# Altium PCB Main_Board - 06162023 - RevA.PcbDoc (part 1 of 2)
Units mil, origin at the board's own origin, x right, y up, seen from the top; angles counter-clockwise.
Board outline 8721.46 x 3937.01 mil, 4 copper layers (Top Layer, Layer 2, Layer 3, Bottom Layer), stack 22.378 mil thick; 18 components, 31 nets, 221 pads, 55 vias.
Unrouted connection lines stored in the file: 4.
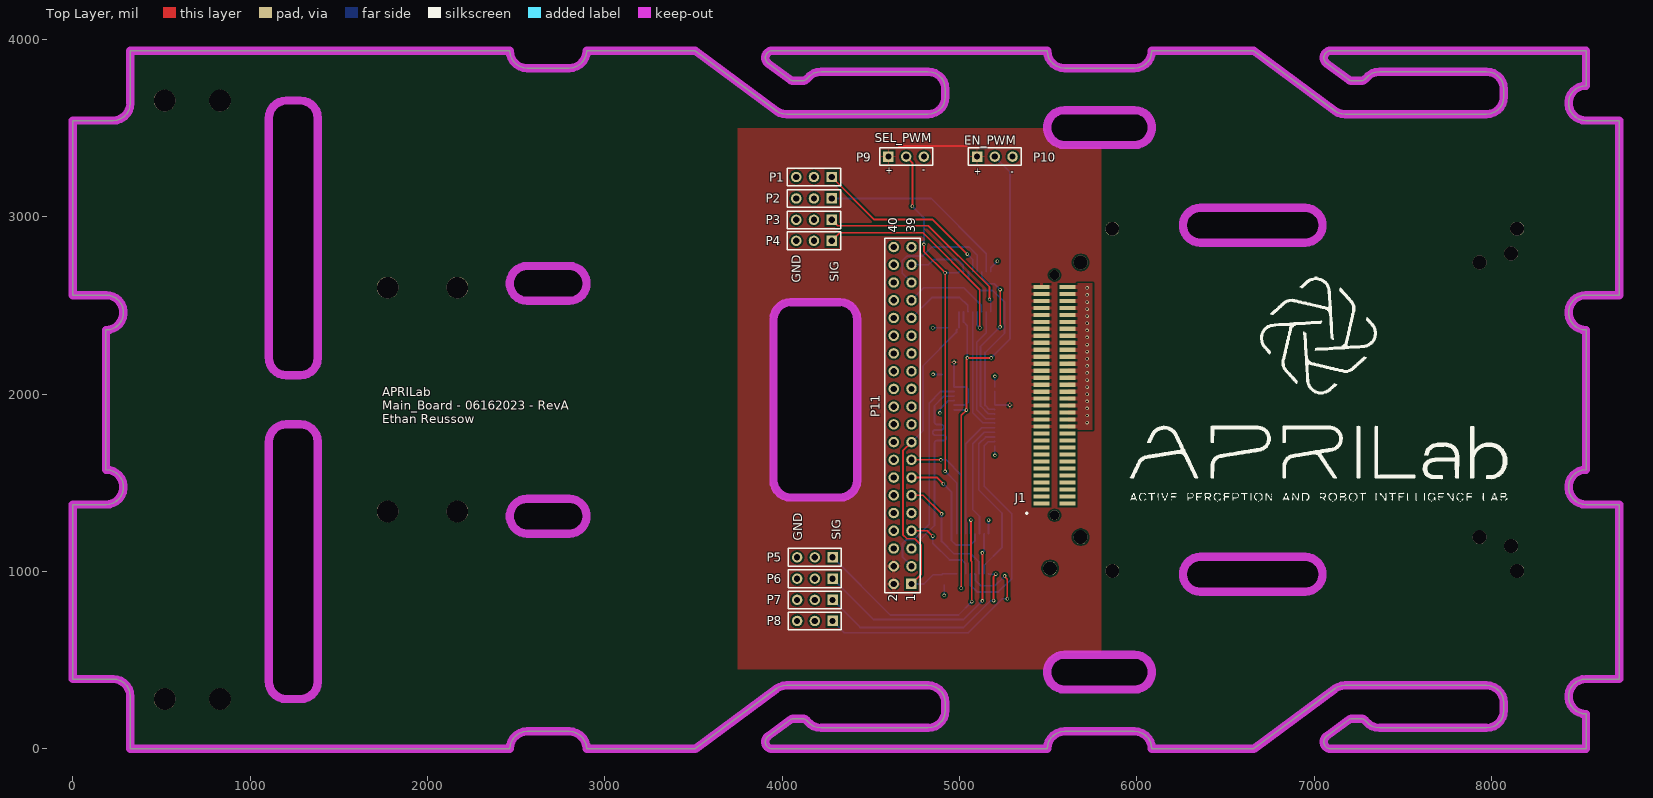
[diagram p0: Top Layer view]
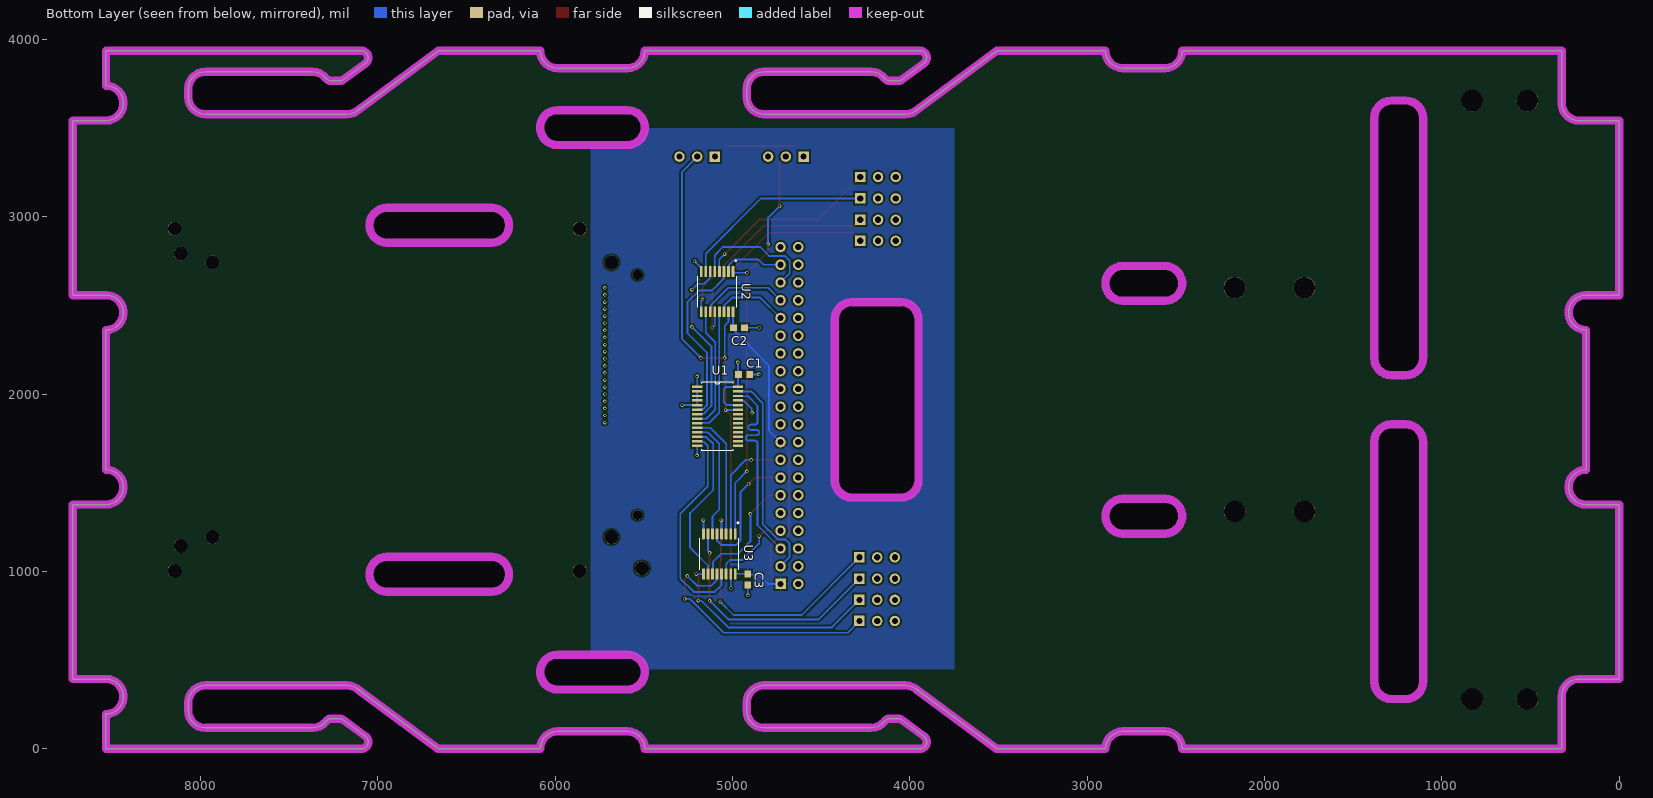
[diagram p1: Bottom Layer view, seen from below]
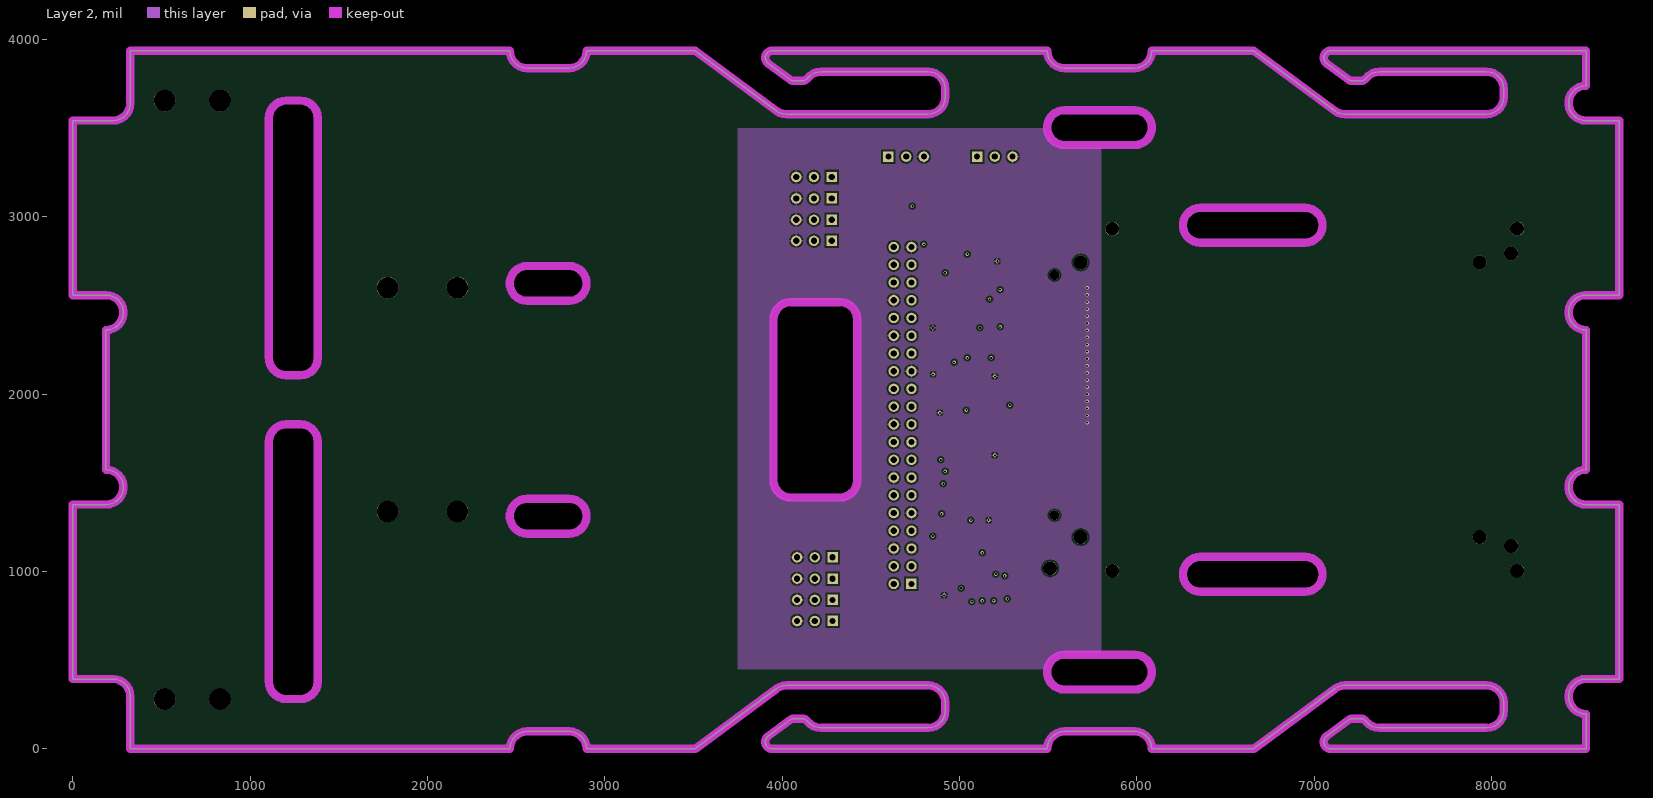
[diagram p2: Layer 2]
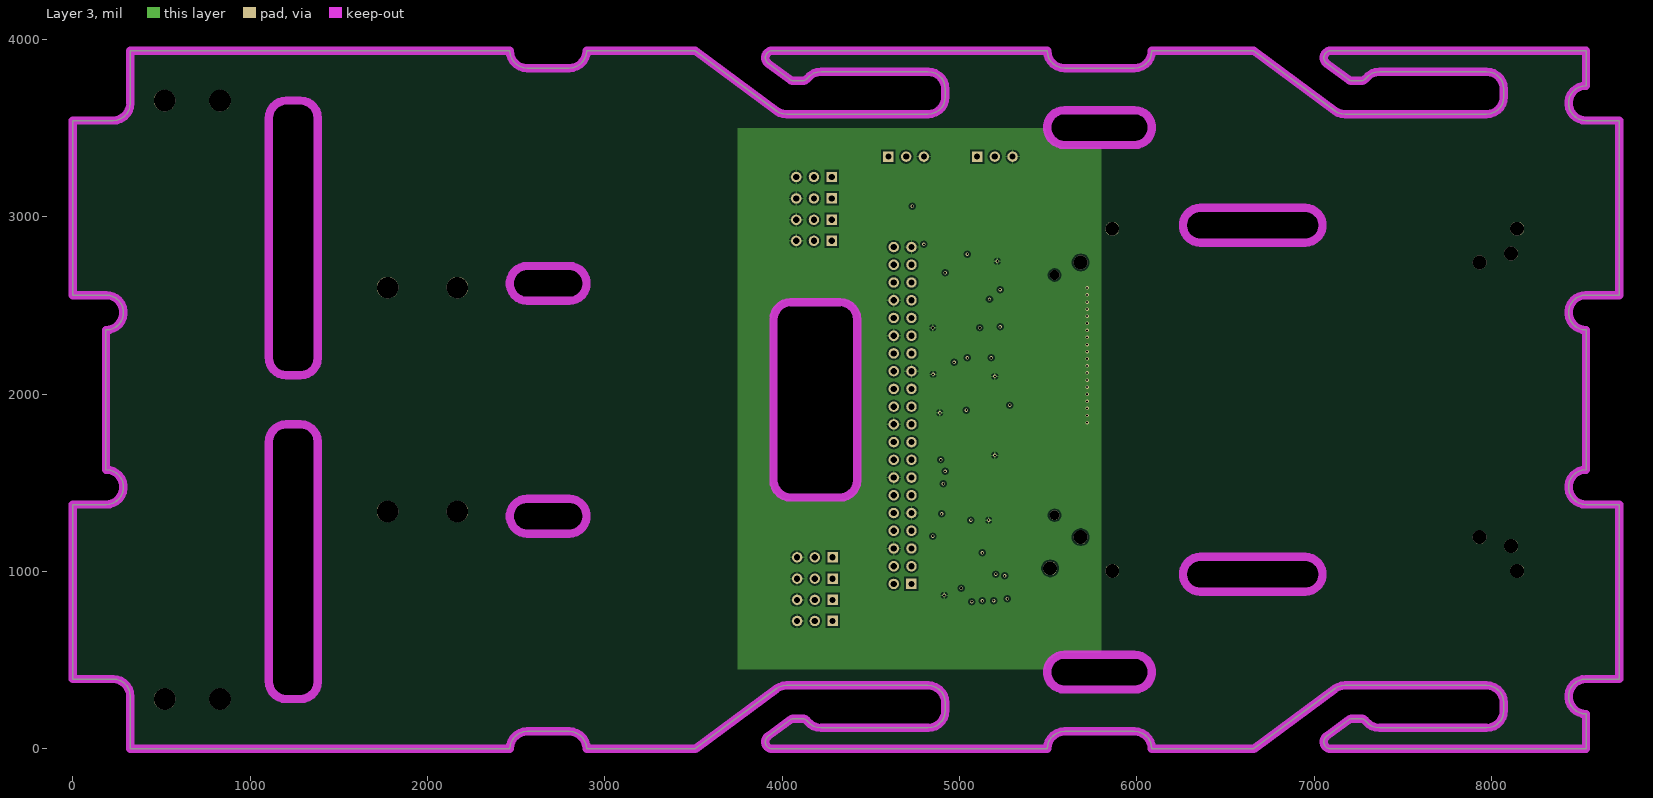
[diagram p3: Layer 3]

## Layer stack, top to bottom
Top Solder: solder mask 0.4, Solder Resist, Dk 3.5
Top Layer: signal copper 1.4
Dielectric 2: prepreg 2.8, PP-006, Dk 4.1
Layer 2: signal copper 0.689
Dielectric 1: dielectric 12.6, FR-4, Dk 4.8
Layer 3: signal copper 0.689
Dielectric 3: prepreg 2.8, PP-006, Dk 4.1
Bottom Layer: signal copper 1.4
Bottom Solder: solder mask 0.4, Solder Resist, Dk 3.5

## Board outline
377 vertices, not listed, extent 0,0 8721.46,3937.01
cut-out: 2563.09,2526.25 2542.63,2528.4 2523.06,2534.76 2505.24,2545.04 2489.95,2558.81 2477.85,2575.46 2469.48,2594.26 2465.2,2614.38 2465.2,2634.96 2469.48,2655.09 2477.85,2673.88 2489.95,2690.53 2505.24,2704.3 2523.06,2714.59 2542.63,2720.95 2563.09,2723.1 2799.31,2723.1 2819.77,2720.95 2839.34,2714.59 2857.16,2704.3 2872.45,2690.53 2884.55,2673.88 2892.92,2655.09 2897.2,2634.96 2897.2,2614.38 2892.92,2594.26 2884.55,2575.46 2872.45,2558.81 2857.16,2545.04 2839.34,2534.76 2819.77,2528.4 2799.31,2526.25
cut-out: 2563.09,1213.91 2542.63,1216.06 2523.06,1222.42 2505.24,1232.71 2489.95,1246.48 2477.85,1263.12 2469.48,1281.92 2465.2,1302.05 2465.2,1322.62 2469.48,1342.75 2477.85,1361.55 2489.95,1378.19 2505.24,1391.96 2523.06,1402.25 2542.63,1408.61 2563.09,1410.76 2799.31,1410.76 2819.77,1408.61 2839.34,1402.25 2857.16,1391.96 2872.45,1378.19 2884.55,1361.55 2892.92,1342.75 2897.2,1322.62 2897.2,1302.05 2892.92,1281.92 2884.55,1263.12 2872.45,1246.48 2857.16,1232.71 2839.34,1222.42 2819.77,1216.06 2799.31,1213.91
cut-out: 1283.56,2106.3 1204.82,2106.3 1182.92,2108.77 1162.12,2116.05 1143.46,2127.77 1127.87,2143.36 1116.14,2162.02 1108.86,2182.82 1106.4,2204.72 1106.4,3557.68 1108.86,3579.58 1116.14,3600.38 1127.87,3619.04 1143.46,3634.63 1162.12,3646.35 1182.92,3653.63 1204.82,3656.1 1283.56,3656.1 1305.46,3653.63 1326.27,3646.35 1344.93,3634.63 1360.51,3619.04 1372.24,3600.38 1379.52,3579.58 1381.99,3557.68 1381.99,2204.72 1379.52,2182.82 1372.24,2162.02 1360.51,2143.36 1344.93,2127.77 1326.27,2116.05 1305.46,2108.77
cut-out: 1283.56,280.91 1204.82,280.91 1182.92,283.37 1162.12,290.65 1143.46,302.38 1127.87,317.96 1116.14,336.63 1108.86,357.43 1106.4,379.33 1106.4,1732.28 1108.86,1754.18 1116.14,1774.99 1127.87,1793.65 1143.46,1809.24 1162.12,1820.96 1182.92,1828.24 1204.82,1830.71 1283.56,1830.71 1305.46,1828.24 1326.27,1820.96 1344.93,1809.24 1360.51,1793.65 1372.24,1774.99 1379.52,1754.18 1381.99,1732.28 1381.99,379.33 1379.52,357.43 1372.24,336.63 1360.51,317.96 1344.93,302.38 1326.27,290.65 1305.46,283.37
cut-out: 6949.8,885.83 6359.25,885.83 6338.79,887.98 6319.22,894.34 6301.4,904.62 6286.11,918.39 6274.01,935.04 6265.64,953.84 6261.37,973.96 6261.37,994.54 6265.64,1014.67 6274.01,1033.46 6286.11,1050.11 6301.4,1063.88 6319.22,1074.17 6338.79,1080.53 6359.25,1082.68 6949.8,1082.68 6970.27,1080.53 6989.84,1074.17 7007.66,1063.88 7022.95,1050.11 7035.04,1033.46 7043.41,1014.67 7047.69,994.54 7047.69,973.96 7043.41,953.84 7035.04,935.04 7022.95,918.39 7007.66,904.62 6989.84,894.34 6970.27,887.98
cut-out: 6359.25,3051.18 6949.8,3051.18 6970.27,3049.03 6989.84,3042.67 7007.66,3032.38 7022.95,3018.61 7035.04,3001.97 7043.41,2983.17 7047.69,2963.04 7047.69,2942.47 7043.41,2922.34 7035.04,2903.54 7022.95,2886.9 7007.66,2873.13 6989.84,2862.84 6970.27,2856.48 6949.8,2854.33 6359.25,2854.33 6338.79,2856.48 6319.22,2862.84 6301.4,2873.13 6286.11,2886.9 6274.01,2903.54 6265.64,2922.34 6261.37,2942.47 6261.37,2963.04 6265.64,2983.17 6274.01,3001.97 6286.11,3018.61 6301.4,3032.38 6319.22,3042.67 6338.79,3049.03
cut-out: 5987.36,334.65 5593.66,334.65 5573.19,336.8 5553.62,343.15 5535.8,353.44 5520.51,367.21 5508.42,383.86 5500.05,402.66 5495.77,422.78 5495.77,443.36 5500.05,463.49 5508.42,482.28 5520.51,498.93 5535.8,512.7 5553.62,522.99 5573.19,529.35 5593.66,531.5 5987.36,531.5 6007.82,529.35 6027.39,522.99 6045.21,512.7 6060.5,498.93 6072.6,482.28 6080.96,463.49 6085.24,443.36 6085.24,422.78 6080.96,402.66 6072.6,383.86 6060.5,367.21 6045.21,353.44 6027.39,343.15 6007.82,336.8
cut-out: 5593.66,3602.36 5987.36,3602.36 6007.82,3600.21 6027.39,3593.85 6045.21,3583.56 6060.5,3569.8 6072.6,3553.15 6080.96,3534.35 6085.24,3514.22 6085.24,3493.65 6080.96,3473.52 6072.6,3454.72 6060.5,3438.08 6045.21,3424.31 6027.39,3414.02 6007.82,3407.66 5987.36,3405.51 5593.66,3405.51 5573.19,3407.66 5553.62,3414.02 5535.8,3424.31 5520.51,3438.08 5508.42,3454.72 5500.05,3473.52 5495.77,3493.65 5495.77,3514.22 5500.05,3534.35 5508.42,3553.15 5520.51,3569.8 5535.8,3583.56 5553.62,3593.85 5573.19,3600.21
cut-out: 4050.26,2519.68 4325.85,2519.68 4347.76,2517.22 4368.56,2509.94 4387.22,2498.21 4402.81,2482.63 4414.53,2463.96 4421.81,2443.16 4424.28,2421.26 4424.28,1515.75 4421.81,1493.85 4414.53,1473.04 4402.81,1454.38 4387.22,1438.8 4368.56,1427.07 4347.76,1419.79 4325.85,1417.32 4050.26,1417.32 4028.36,1419.79 4007.56,1427.07 3988.9,1438.8 3973.31,1454.38 3961.59,1473.04 3954.31,1493.85 3951.84,1515.75 3951.84,2421.26 3954.31,2443.16 3961.59,2463.96 3973.31,2482.63 3988.9,2498.21 4007.56,2509.94 4028.36,2517.22

## Design rules (kind name [scope] priority, off if disabled: settings)
Clearance [All] p1: gap=10 ignorepadtopadclearanceinfootprint=TRUE except(0: Arc-Hole Track-Hole SMDPad-Hole THPad-Hole Via-Hole Fill-Hole Poly-Hole Region-Hole Text-Hole)
PlaneConnect [All] p1: pad.planeconnectstyle=Relief pad.reliefexpansion=20 pad.reliefentries=4 pad.reliefconductorwidth=10 pad.reliefairgap=5 via.planeconnectstyle=Relief via.reliefexpansion=25 via.reliefentries=4 via.reliefconductorwidth=10 via.reliefairgap=10
PolygonConnect [All] p1: connectstyle=Relief reliefconductorwidth=10 reliefentries=4 polygonreliefangle="90 Angle" airgapwidth=10
RoutingVias [All] p1: holewidth=28 width=50 viastyle="Through Hole" minholewidth=28 minwidth=50 maxholewidth=28 maxwidth=50
SolderMaskExpansion [All] p1: expansion=4 istentingtop=FALSE
Width [All] p1: maxlimit=10 minlimit=10 preferedwidth=10
29 further rules are at their usual default settings.

## Classes and differential pairs
component class "Main Board Motor Control": C2 C3 J1 P1 P2 P3 P4 P5 P6 P7 P8 P9 P10 P11 U1 U2 U3

## Components (designator, comment, footprint, x,y, rotation, side; value= is the part's Value field where it differs from the comment)
C1 "CL10B104KB8NNNC" CAPC0603 4935,2111.52 r180 bottom value=100nF
C2 "CL10B104KB8NNNC" CAPC0603 4965,2375 r180 bottom value=100nF
C3 "CL10B104KB8NNNC" CAPC0603 4915,955 r270 bottom value=100nF
J1 "0714362164" "1.0mm mezzanine connector 64 pin" 5464.33,1384.45 r90 top
P1 "Header 3" HDR1X3 4280,3225 r180 top
P2 "Header 3" HDR1X3 4280,3103.86 r180 top
P3 "Header 3" HDR1X3 4280,2983.16 r180 top
P4 "Header 3" HDR1X3 4280,2865 r180 top
P5 "Header 3" HDR1X3 4285,1080 r180 top
P6 "Header 3" HDR1X3 4285,960 r180 top
P7 "Header 3" HDR1X3 4285,840.12 r180 top
P8 "Header 3" HDR1X3 4285,721.21 r180 top
P9 "Header 3" HDR1X3 4600,3340 r0 top
P10 "Header 3" HDR1X3 5100,3340 r0 top
P11 "Header 20X2" HDR2X20 4730,930 r90 top
U1 "PCA9685PW,118" SOP65P640X110-28N 5085,1875 r180 bottom
U2 "74CBTLV3257" TSSOP16 5087.8,2577.99 r270 bottom
U3 "74CBTLV3257" TSSOP16 5075,1100 r270 bottom

## Footprints (in the part's own frame and the unit in brackets; to place one, negate y for a bottom-side part, rotate by r counter-clockwise, add the part's x,y. Pads: shape width x height; smd on the part's side, far side on the other; paste and mask are expansions set on the pad)
"1.0mm mezzanine connector 64 pin" [mm]
  rect 0.6x2.3 smd: 1(0,0) 2(1,0) 3(2,0) 4(3,0) 5(4,0) 6(5,0) 7(6,0) 8(7,0) 9(8,0) 10(9,0) 11(10,0) 12(11,0) 13(12,0) 14(13,0) 15(14,0) 16(15,0) 17(16,0) 18(17,0) 19(18,0) 20(19,0) 21(20,0) 22(21,0) 23(22,0) 24(23,0) 25(24,0) 26(25,0) 27(26,0) 28(27,0) 29(28,0) 30(29,0) 31(30,0) 32(31,0) 33(0,-3.7) 34(1,-3.7) 35(2,-3.7) 36(3,-3.7) 37(4,-3.7) 38(5,-3.7) 39(6,-3.7) 40(7,-3.7) 41(8,-3.7) 42(9,-3.7) 43(10,-3.7) 44(11,-3.7) 45(12,-3.7) 46(13,-3.7) 47(14,-3.7) 48(15,-3.7) 49(16,-3.7) 50(17,-3.7) 51(18,-3.7) 52(19,-3.7) 53(20,-3.7) 54(21,-3.7) 55(22,-3.7) 56(23,-3.7) 57(24,-3.7) 58(25,-3.7) 59(26,-3.7) 60(27,-3.7) 61(28,-3.7) 62(29,-3.7) 63(30,-3.7) 64(31,-3.7)
  round 1.4 hole 1.4 unplated: H1(-1.7,-1.85) H2(32.7,-1.85)
CAPC0603 [mm] "Chip Capacitor, 2-Leads, Body 1.60x0.80mm, IPC Medium Density"
  rect 1x0.95 smd: 1(-0.8,0) 2(0.8,0)
  body extent -0.88,-0.48 0.87,0.48, height 0.8
HDR1X3 [mm] "Connector; Header; 3 Position"
  rect 1.5x1.5 hole 0.9: 1(0,0)
  round 1.5 hole 0.9: 2(2.54,0) 3(5.08,0)
  silkscreen extent -1.27,-1.27 6.35,1.27
HDR2X20 [mm] "Connector; Header; 20x2 Position"
  rect 1.5x1.5 hole 0.9: 1(0,0)
  round 1.5 hole 0.9: 2(0,2.54) 3(2.54,0) 4(2.54,2.54) 5(5.08,0) 6(5.08,2.54) 7(7.62,0) 8(7.62,2.54) 9(10.16,0) 10(10.16,2.54) 11(12.7,0) 12(12.7,2.54) 13(15.24,0) 14(15.24,2.54) 15(17.78,0) 16(17.78,2.54) 17(20.32,0) 18(20.32,2.54) 19(22.86,0) 20(22.86,2.54) 21(25.4,0) 22(25.4,2.54) 23(27.94,0) 24(27.94,2.54) 25(30.48,0) 26(30.48,2.54) 27(33.02,0) 28(33.02,2.54) 29(35.56,0) 30(35.56,2.54) 31(38.1,0) 32(38.1,2.54) 33(40.64,0) 34(40.64,2.54) 35(43.18,0) 36(43.18,2.54) 37(45.72,0) 38(45.72,2.54) 39(48.26,0) 40(48.26,2.54)
  silkscreen extent -1.27,-1.27 49.53,3.81
SOP65P640X110-28N [mil]
  rect 58x14 smd: 1(-115,166) 2(-115,141) 3(-115,115) 4(-115,90) 5(-115,64) 6(-115,38) 7(-115,13) 8(-115,-13) 9(-115,-38) 10(-115,-64) 11(-115,-90) 12(-115,-115) 13(-115,-141) 14(-115,-166) 15(115,-166) 16(115,-141) 17(115,-115) 18(115,-90) 19(115,-64) 20(115,-38) 21(115,-13) 22(115,13) 23(115,38) 24(115,64) 25(115,90) 26(115,115) 27(115,141) 28(115,166)
  silkscreen extent -89,-193 89,193
TSSOP16 [mm]
  rrect25% 1.57x0.41 smd: 1(-2.87,2.275) 2(-2.87,1.625) 3(-2.87,0.975) 4(-2.87,0.325) 5(-2.87,-0.325) 6(-2.87,-0.975) 7(-2.87,-1.625) 8(-2.87,-2.275) 9(2.87,-2.275) 10(2.87,-1.625) 11(2.87,-0.975) 12(2.87,-0.325) 13(2.87,0.325) 14(2.87,0.975) 15(2.87,1.625) 16(2.87,2.275)
  silkscreen extent -4.54,-2.8 2.25,2.8

## Part data
C1 C2 C3: "0.1 µF ±10% 50V Ceramic Capacitor X7R 0603 (1608 Metric)", ComponentLink1Description="New link", Supplier 1="Arrow Electronics", Supplier Part Number 1=CL10B104KB8NNNC
J1: "64 Position Connector Plug, Center Strip Contacts Surface Mount Gold"
P1 P2 P3 P4 P5 P6 P7 P8 P9 P10: "Header, 3-Pin", LatestRevisionDate=17-Jul-2002, LatestRevisionNote="Re-released for DXP Platform.", Publisher="Altium Limited"
P11: "Header, 20-Pin, Dual row", LatestRevisionDate=17-Jul-2002, LatestRevisionNote="Re-released for DXP Platform.", Publisher="Altium Limited"
U1: "LED Driver IC 16 Output Linear - PWM Dimming 25mA 28-TSSOP", Package="TSSOP-28 NXP Semiconductors", Availability="In Stock", MF="NXP USA", MP=PCA9685PW,118, Price=None, Purchase-URL=https://pricing.snapeda.com/search/part/PCA9685PW,118/?ref=eda
U2 U3: "Mux; 4 channel; 2:1; Demux", Supplier Part Number 1=1727-4410-1-ND, Supplier 1=Digi-Key

## Free pads (board coordinates)
  round 122.05 hole 122.05 unplated: 1(518.21,280.91) 1(518.21,3656.1) 1(830.81,280.91) 1(830.81,3656.1) 1(1775.69,1338.58) 1(1775.69,2601.18) 1(2169.39,1338.58) 1(2169.39,2601.18)
  round 78.74 hole 78.74: 1(5512.11,1018.5) 1(5684.05,1193.5) 1(5684.05,2743.5) 1(5862.3,1003.94) 1(5862.3,2933.07)
  round 78.74 hole 78.74 unplated: 1(7934.05,1193.5) 1(7934.05,2743.5) 1(8112.11,1143.5) 1(8112.11,2793.5) 1(8145.77,1003.94) 1(8145.77,2933.07)

## Via types
v1: diameter 19.68, hole 11.81, Top Layer to Bottom Layer, 55 vias

## Nets (pads, with @x,y where several pads share a name; then routed paths per layer and width w, separated by ;. In a path a pad name is that pad's centre, name@x,y a point inside that pad or via, vN(x,y) a via of type N, cw(c..) or ccw(c..) an arc to the next point about the centre after c; other vN are vias at no path point)
3.3V: C2.1 C3.1 P11.1 P11.17 U2.16 U3.16 | length 2022.7
  Top Layer w10: P11.1@4730,930 4785,985 4785,1149.14 4749.14,1185 4705,1185 4681.42,1208.58 4681.42,1681.42 P11.17@4730,1730
  Bottom Layer w10: P11.1@4730,930 4800,930 4851.5,981.5 4900,981.5 4905.51,987.01 U3.16@4985.43,987.01 ; P11.17@4730,1730 4794.69,1794.69 4794.69,2159.69 4983.45,2348.45 4983.45,2361.95 C2.1@4986.5,2365 ; C2.1@4996.5,2375 4998.23,2376.73 U2.16@4998.23,2465
5V: C1.1 J1.12 J1.13 J1.14 J1.15 J1.16 J1.17 J1.18 J1.19 J1.20 J1.21 J1.22 J1.23 J1.24 J1.25 J1.26 J1.27 J1.28 J1.29 J1.30 J1.31 J1.32 P9.1 P10.1 P11.2 P11.4 U1.2 U1.3 U1.4 U1.5 U1.24 U1.28 | length 929.9
  Top Layer w10: 4660,3400 5040,3400
  Bottom Layer w10: v1(4970,2180) U1.28@4970,2041 5038.14,2041 5050,2029.14 5050,1955 5034,1939 U1.24@4970,1939 U1.24@4972,1941 ; U1.2@5200,2016 U1.3@5200,1990 U1.4@5200,1965 U1.5@5200,1939 v1(5284,1939) v1@5285,1940
EN_PWM: P10.2 U1.23 U2.15 U3.15 | length 3084.9
  Top Layer w10: v1(5010.51,905.51) 5010.51,1880.51 v1(5040,1910) 5040,2197.38 5045,2202.38 v1(5045,2205) v1(5180,2205)
  Bottom Layer w10: U1.23@4970,1913 4971.5,1911.5 5038.5,1911.5 v1(5040,1910) ; v1@5010,905 v1(5010.51,905.51) 5011.02,906.02 U3.15@5011.02,987.01 ; U2.15@5023.82,2465 5023.82,2407.28 5045,2386.1 v1(5045,2205) ; v1(5180,2205) 5285,2310 5285,3255 P10.2@5200,3340
GND: C1.2 C2.2 C3.2 J1.44 J1.45 J1.46 J1.47 J1.48 J1.49 J1.50 J1.51 J1.52 J1.53 J1.54 J1.55 J1.56 J1.57 J1.58 J1.59 J1.60 J1.61 J1.62 J1.63 J1.64 P1.3 P2.3 P3.3 P4.3 P5.3 P6.3 P7.3 P8.3 P9.3 P10.3 P11.6 P11.9 P11.14 P11.20 P11.25 P11.30 P11.34 P11.39 U1.1 U1.14 U1.25 U2.8 U3.8 | length 583.2
  Bottom Layer w10: v1@4850,2110 v1(4851.52,2111.52) C1.2@4903.5,2111.52 ; v1(4850,2375) C2.2@4933.5,2375 ; v1(4890,1895) 4891.85,1896.85 4891.85,1918.07 4936.79,1963 4968,1963 U1.25@4970,1965 ; v1(4915,865) C3.2@4915,923.5 ; U3.8@5164.57,1212.99 v1(5164.57,1289.57) v1@5165,1290 ; U2.8@5177.36,2690.98 5177.36,2713.82 5213.54,2750 v1@5215,2750 ; v1(5200,1655) U1.14@5200,1709 ; U1.1@5200,2041 v1(5200,2100)
  other v1: 5720,1840 5720,1880 5720,1920 5720,1960 5720,2000 5720,2040 5720,2080 5720,2120 5720,2160 5720,2200 5720,2240 5720,2280 5720,2320 5720,2360 5720,2400 5720,2440 5720,2480 5720,2520 5720,2560 5720,2600 5214.27,2750
HW_PWM_1: U1.6 U2.3 | length 993
  Bottom Layer w10: U2.3@5049.41,2690.98 5051.93,2688.46 5051.93,2648.07 5115,2585 5188.86,2585 5255,2518.86 5255,2345 5145,2235 5145,1936.79 5166.79,1915 5198,1915 U1.6@5200,1913
HW_PWM_2: U1.7 U2.6 | length 966.1
  Top Layer w10: v1(5230,2380) v1(5230,2590)
  Bottom Layer w10: U2.6@5126.18,2690.98 5126.18,2667.6 5128.7,2665.08 5128.7,2655.05 5160.3,2623.45 5196.55,2623.45 v1(5230,2590) ; U1.7@5200,1888 5198,1890 5163.5,1890 5120,1933.5 5120,2270 v1(5230,2380)
HW_PWM_3: U1.8 U2.10 | length 698.1
  Bottom Layer w10: U2.10@5151.77,2465 5151.77,2346.77 5097.83,2292.83 5097.83,1912.17 5148,1862 U1.8@5200,1862
HW_PWM_4: U1.9 U2.13 | length 719
  Bottom Layer w10: U2.13@5075,2465 5075,1895 5131,1839 5198,1839 U1.9@5200,1837
HW_PWM_5: U1.10 U3.3 | length 709
  Bottom Layer w10: U3.3@5036.61,1212.99 5036.61,1721.61 5126,1811 U1.10@5200,1811
HW_PWM_6: U1.11 U3.6 | length 674.8
  Bottom Layer w10: U3.6@5113.39,1212.99 5113.39,1311.61 5075,1350 5075,1720 5140,1785 U1.11@5200,1785
HW_PWM_7: U1.12 U3.10 | length 935.3
  Bottom Layer w10: U3.10@5138.98,987.01 5138.98,1033.98 5240,1135 5240,1330 5110,1460 5110,1720 5148,1758 5198,1758 U1.12@5200,1760
HW_PWM_8: U1.13 U3.13 | length 1227.9
  Bottom Layer w10: U3.13@5062.2,987.01 5062.2,922.8 5100,885 5220,885 5295,960 5295,1325 5140,1480 5140,1710 5162,1732 5198,1732 U1.13@5200,1734
I2C1_SCL: P11.5 U1.26 | length 1196.1
  Bottom Layer w10: P11.5@4730,1130 4860,1260 4860,1688.66 4860,1723.66 cw(c4875,1723.66) 4875,1738.66 4911,1738.66 ccw(c4911,1753.66) 4911,1768.66 4865,1768.66 cw(c4865,1783.66) 4865,1798.66 4896.99,1798.66 ccw(c4896.99,1813.66) 4896.99,1828.66 4875,1828.66 cw(c4875,1843.66) 4860,1843.66 4860,1884.36 4860,1935 4913,1988 4968,1988 U1.26@4970,1990
I2C1_SDA: P11.3 U1.27 | length 1195.4
  Bottom Layer w10: P11.3@4730,1030 4680,1080 4680,1160 4700,1180 4742.97,1180 4830,1267.03 4830,1950 4896,2016 U1.27@4970,2016
MOTOR_1: P1.1 U2.4 | length 1056.6
  Top Layer w10: P1.1@4280,3225 4520,2985 4850,2985 v1(5045,2790)
  Bottom Layer w10: v1(5045,2790) 5075,2760 U2.4@5075,2690.98
MOTOR_2: P2.1 U2.7 | length 1102.7
  Bottom Layer w10: P2.1@4280,3103.86 4841.14,3103.86 5151.77,2793.23 U2.7@5151.77,2690.98
MOTOR_3: P3.1 U2.9 | length 1189.7
  Top Layer w10: P3.1@4280,2983.16 4313.16,2950 4825,2950 5170,2605 v1(5170,2535)
  Bottom Layer w10: v1(5170,2535) 5177.36,2527.64 U2.9@5177.36,2465
MOTOR_4: P4.1 U2.12 | length 1297.2
  Top Layer w10: P4.1@4280,2865 4325,2910 4795,2910 5115,2590 v1(5115,2375)
  Bottom Layer w10: U2.12@5100.59,2465 5100.59,2389.41 v1(5115,2375)
MOTOR_5: P5.1 U3.4 | length 1490.9
  Top Layer w10: v1(5065,1290) 5065,1061.57 5070,1056.57 v1(5070,830)
  Bottom Layer w10: P5.1@4285,1080 4610,755 4995,755 v1(5070,830) ; U3.4@5062.2,1212.99 5063.6,1214.39 5063.6,1288.6 v1(5065,1290)
MOTOR_6: P6.1 U3.7 | length 1365.9
  Top Layer w10: v1(5130,835) v1(5130,1105)
  Bottom Layer w10: P6.1@4285,960 4515,730 5025,730 v1(5130,835) ; v1(5130,1105) 5130,1107.62 5139.49,1117.11 5139.49,1212.48 U3.7@5138.98,1212.99
MOTOR_7: P7.1 U3.9 | length 1230
  Top Layer w10: v1(5192.74,835.83) 5192.74,970.12 5205,982.38 v1(5205,985)
  Bottom Layer w10: P7.1@4285,840.12 4440.12,685 5025,685 5175.83,835.83 v1(5192.74,835.83) ; U3.9@5164.57,987.01 5166.57,985 v1(5205,985)
MOTOR_8: P8.1 U3.12 | length 1464.4
  Top Layer w10: v1(5255,975) 5255,972.38 5270.51,956.87 v1(5270.51,846.66)
  Bottom Layer w10: P8.1@4285,721.21 4351.21,655 5050,655 5241.02,846.02 5269.87,846.02 v1(5270.51,846.66) ; U3.12@5087.8,987.01 5090.31,984.49 5090.31,951.07 5121.39,920 5200,920 v1(5255,975)
SEL_PWM: P9.2 U2.1 U3.1 | length 2327.7
  Top Layer w10: P9.2@4700,3340 4735,3305 v1(4735,3060) ; v1(4800,2845) 4800,2805 v1(4920,2685) v1(4920,1565)
  Bottom Layer w10: v1(4735,3060) 4800,2995 v1(4800,2845) ; v1(4920,1565) 4985.43,1499.57 U3.1@4985.43,1212.99 ; v1(4920,2685) 4995.16,2685 4998.23,2688.07 U2.1@4998.23,2690.98
SW_PWM_1: P11.37 U2.2 | length 355.5
  Bottom Layer w10: P11.37@4730,2730 4825,2730 4855,2760 4990,2760 5021.91,2728.09 5021.91,2692.89 U2.2@5023.82,2690.98
SW_PWM_2: P11.35 U2.5 | length 710.6
  Bottom Layer w10: P11.35@4730,2630 4678.55,2681.45 4678.55,2753.07 4705.48,2780 4795,2780 4845,2830 5055,2830 5100.59,2784.41 U2.5@5100.59,2690.98
SW_PWM_3: P11.33 U2.11 | length 500.9
  Bottom Layer w10: P11.33@4730,2530 4800,2600 5025,2600 5123.66,2501.34 5123.66,2467.52 U2.11@5126.18,2465
SW_PWM_4: P11.31 U2.14 | length 419.8
  Bottom Layer w10: P11.31@4730,2430 4845,2545 5002.83,2545 5046.89,2500.94 5046.89,2467.52 U2.14@5049.41,2465
SW_PWM_5: P11.15 U3.2 | length 647.6
  Top Layer w10: P11.15@4730,1630 v1(4895,1630)
  Bottom Layer w10: v1(4895,1630) 4925,1630 5011.02,1543.98 U3.2@5011.02,1212.99
SW_PWM_6: P11.13 U3.5 | length 725.9
  Top Layer w10: P11.13@4730,1530 4875,1530 v1(4910,1495)
  Bottom Layer w10: v1(4910,1495) 4955,1450 4955,1175 4980,1150 5065,1150 5087.8,1172.8 U3.5@5087.8,1212.99
SW_PWM_7: P11.11 U3.11 | length 695.5
  Top Layer w10: P11.11@4730,1430 4795,1430 v1(4900,1325)
  Bottom Layer w10: v1(4900,1325) 4900,1170 4970,1100 5065,1100 5110.87,1054.13 5110.87,989.53 U3.11@5113.39,987.01
SW_PWM_8: P11.7 U3.14 | length 463.7
  Top Layer w10: P11.7@4730,1230 4820,1230 v1(4850,1200)
  Bottom Layer w10: v1(4850,1200) 4850,1160 4945,1065 5015,1065 5036.61,1043.39 U3.14@5036.61,987.01
pads on no net: J1.1 J1.2 J1.3 J1.4 J1.5 J1.6 J1.7 J1.8 J1.9 J1.10 J1.11 J1.33 J1.34 J1.35 J1.36 J1.37 J1.38 J1.39 J1.40 J1.41 J1.42 J1.43 J1.H1 J1.H2 P1.2 P2.2 P3.2 P4.2 P5.2 P6.2 P7.2 P8.2 P11.8 P11.10 P11.12 P11.16 P11.18 P11.19 P11.21 P11.22 P11.23 P11.24 P11.26 P11.27 P11.28 P11.29 P11.32 P11.36 P11.38 P11.40 U1.15 U1.16 U1.17 U1.18 U1.19 U1.20 U1.21 U1.22

## Polygon pours and split planes (outlines as drawn)
5V on Top Layer "NONET_L-01_P-001" (solid, remove dead copper, pour order 8): 3750,3500 5800,3500 5800,450 3750,450
GND on Top Layer "NONET_L-01_P-001" (solid, pour order 7): 5550,2625 5750,2625 5750,1800 5550,1800
3.3V on Bottom Layer "NONET_L-01_P-001" (solid, remove dead copper, pour order 9): 3750,3500 5800,3500 5800,450 3750,450
GND on Layer 2 "NONET_L-01_P-001" (solid, pour order 0): 3750,3500 5800,3500 5800,450 3750,450
GND on Layer 3 "NONET_L-01_P-001" (solid, pour order 3): 3750,3500 5800,3500 5800,450 3750,450

## Keep-outs
Keep-Out Layer:
  lines w47.24: 0,393.7 226.87,393.7 ; 0,393.7 0,1377.95 ; 0,393.7 226.87,393.7 ; 0,393.7 0,1377.95 ; 0,1377.95 187.5,1377.95 ; 0,1377.95 187.5,1377.95 ; 0,2559.05 187.5,2559.05 ; 0,2559.05 0,3543.31 ; 0,2559.05 187.5,2559.05 ; 0,2559.05 0,3543.31 ; 0,3543.31 226.87,3543.31 ; 0,3543.31 226.87,3543.31 ; 187.5,1377.95 207.96,1380.1 ; 187.5,1377.95 207.96,1380.1 ; 187.5,1574.8 207.96,1572.65 ; 187.5,1574.8 187.5,2362.2 ; 187.5,1574.8 207.96,1572.65 ; 187.5,1574.8 187.5,2362.2 ; 187.5,2362.2 207.96,2364.36 ; 187.5,2362.2 207.96,2364.36 ; 187.5,2559.05 207.96,2556.9 ; 187.5,2559.05 207.96,2556.9 ; 207.96,1380.1 227.53,1386.46 ; 207.96,1380.1 227.53,1386.46 ; 207.96,1572.65 227.53,1566.29 ; 207.96,1572.65 227.53,1566.29 ; 207.96,2364.36 227.53,2370.71 ; 207.96,2364.36 227.53,2370.71 ; 207.96,2556.9 227.53,2550.55 ; 207.96,2556.9 227.53,2550.55 ; 226.87,393.7 248.77,391.23 ; 226.87,393.7 248.77,391.23 ; 226.87,3543.31 248.77,3545.77 ; 226.87,3543.31 248.77,3545.77 ; 227.53,1386.46 245.35,1396.75 ; 227.53,1386.46 245.35,1396.75 ; 227.53,1566.29 245.35,1556.01 ; 227.53,1566.29 245.35,1556.01 ; 227.53,2370.71 245.35,2381 ; 227.53,2370.71 245.35,2381 ; 227.53,2550.55 245.35,2540.26 ; 227.53,2550.55 245.35,2540.26 ; 245.35,1396.75 260.64,1410.52 ; 245.35,1396.75 260.64,1410.52 ; 245.35,1556.01 260.64,1542.24 ; 245.35,1556.01 260.64,1542.24 ; 245.35,2381 260.64,2394.77 ; 245.35,2381 260.64,2394.77 ; 245.35,2540.26 260.64,2526.49 ; 245.35,2540.26 260.64,2526.49 ; 248.77,391.23 269.57,383.95 ; 248.77,391.23 269.57,383.95 ; 248.77,3545.77 269.57,3553.05 ; 248.77,3545.77 269.57,3553.05 ; 260.64,1410.52 272.74,1427.17 ; 260.64,1410.52 272.74,1427.17 ; 260.64,1542.24 272.74,1525.59 ; 260.64,1542.24 272.74,1525.59 ; 260.64,2394.77 272.74,2411.42 ; 260.64,2394.77 272.74,2411.42 ; 260.64,2526.49 272.74,2509.84 ; 260.64,2526.49 272.74,2509.84 ; 269.57,383.95 288.24,372.23 ; 269.57,383.95 288.24,372.23 ; 269.57,3553.05 288.24,3564.78 ; 269.57,3553.05 288.24,3564.78 ; 272.74,1427.17 281.11,1445.96 ; 272.74,1427.17 281.11,1445.96 ; 272.74,1525.59 281.11,1506.79 ; 272.74,1525.59 281.11,1506.79 ; 272.74,2411.42 281.11,2430.21 ; 272.74,2411.42 281.11,2430.21 ; 272.74,2509.84 281.11,2491.04 ; 272.74,2509.84 281.11,2491.04 ; 281.11,1445.96 285.39,1466.09 ; 281.11,1445.96 285.39,1466.09 ; 281.11,1506.79 285.39,1486.67 ; 281.11,1506.79 285.39,1486.67 ; 281.11,2430.21 285.39,2450.34 ; 281.11,2430.21 285.39,2450.34 ; 281.11,2491.04 285.39,2470.92 ; 281.11,2491.04 285.39,2470.92 ; 285.39,1466.09 285.39,1486.67 ; 285.39,1466.09 285.39,1486.67 ; 285.39,2450.34 285.39,2470.92 ; 285.39,2450.34 285.39,2470.92 ; 288.24,372.23 303.82,356.64 ; 288.24,372.23 303.82,356.64 ; 288.24,3564.78 303.82,3580.36 ; 288.24,3564.78 303.82,3580.36 ; 303.82,356.64 315.55,337.98 ; 303.82,356.64 315.55,337.98 ; 303.82,3580.36 315.55,3599.03 ; 303.82,3580.36 315.55,3599.03 ; 315.55,337.98 322.83,317.18 ; 315.55,337.98 322.83,317.18 ; 315.55,3599.03 322.83,3619.83 ; 315.55,3599.03 322.83,3619.83 ; 322.83,317.18 325.29,295.28 ; 322.83,317.18 325.29,295.28 ; 322.83,3619.83 325.29,3641.73 ; 322.83,3619.83 325.29,3641.73 ; 325.29,0 2464.66,0 ; 325.29,0 325.29,295.28 ; 325.29,0 2464.66,0 ; 325.29,0 325.29,295.28 ; 325.29,3641.73 325.29,3937.01 ; 325.29,3641.73 325.29,3937.01 ; 325.29,3937.01 2464.66,3937.01 ; 325.29,3937.01 2464.66,3937.01 ; 2464.66,0 2467.13,21.9 ; 2464.66,0 2467.13,21.9 ; 2464.66,3937.01 2467.13,3915.11 ; 2464.66,3937.01 2467.13,3915.11 ; 2467.13,21.9 2474.41,42.7 ; 2467.13,21.9 2474.41,42.7 ; 2467.13,3915.11 2474.41,3894.3 ; 2467.13,3915.11 2474.41,3894.3 ; 2474.41,42.7 2486.14,61.37 ; 2474.41,42.7 2486.14,61.37 ; 2474.41,3894.3 2486.14,3875.64 ; 2474.41,3894.3 2486.14,3875.64 ; 2486.14,61.37 2501.72,76.95 ; 2486.14,61.37 2501.72,76.95 ; 2486.14,3875.64 2501.72,3860.06 ; 2486.14,3875.64 2501.72,3860.06 ; 2501.72,76.95 2520.38,88.68 ; 2501.72,76.95 2520.38,88.68 ; 2501.72,3860.06 2520.38,3848.33 ; 2501.72,3860.06 2520.38,3848.33 ; 2520.38,88.68 2541.19,95.96 ; 2520.38,88.68 2541.19,95.96 ; 2520.38,3848.33 2541.19,3841.05 ; 2520.38,3848.33 2541.19,3841.05 ; 2541.19,95.96 2563.09,98.42 ; 2541.19,95.96 2563.09,98.42 ; 2541.19,3841.05 2563.09,3838.58 ; 2541.19,3841.05 2563.09,3838.58 ; 2563.09,98.42 2799.31,98.42 ; 2563.09,98.42 2799.31,98.42 ; 2563.09,3838.58 2799.31,3838.58 ; 2563.09,3838.58 2799.31,3838.58 ; 2799.31,98.42 2821.21,95.96 ; 2799.31,98.42 2821.21,95.96 ; 2799.31,3838.58 2821.21,3841.05 ; 2799.31,3838.58 2821.21,3841.05 ; 2821.21,95.96 2842.02,88.68 ; 2821.21,95.96 2842.02,88.68 ; 2821.21,3841.05 2842.02,3848.33 ; 2821.21,3841.05 2842.02,3848.33 ; 2842.02,88.68 2860.68,76.95 ; 2842.02,88.68 2860.68,76.95 ; 2842.02,3848.33 2860.68,3860.06 ; 2842.02,3848.33 2860.68,3860.06 ; 2860.68,76.95 2876.26,61.37 ; 2860.68,76.95 2876.26,61.37 ; 2860.68,3860.06 2876.26,3875.64 ; 2860.68,3860.06 2876.26,3875.64 ; 2876.26,61.37 2887.99,42.7 ; 2876.26,61.37 2887.99,42.7 ; 2876.26,3875.64 2887.99,3894.3 ; 2876.26,3875.64 2887.99,3894.3 ; 2887.99,42.7 2895.27,21.9 ; 2887.99,42.7 2895.27,21.9 ; 2887.99,3894.3 2895.27,3915.11 ; 2887.99,3894.3 2895.27,3915.11 ; 2895.27,21.9 2897.74,0 ; 2895.27,21.9 2897.74,0 ; 2895.27,3915.11 2897.74,3937.01 ; 2895.27,3915.11 2897.74,3937.01 ; 2897.74,0 3510.15,0 ; 2897.74,0 3510.15,0 ; 2897.74,3937.01 3510.15,3937.01 ; 2897.74,3937.01 3510.15,3937.01 ; 3510.15,0 3967.15,338.45 ; 3510.15,0 3967.15,338.45 ; 3510.15,3937.01 3967.15,3598.56 ; 3510.15,3937.01 3967.15,3598.56 ; 3905.33,43.25 3905.38,35.05 ; 3905.33,43.25 3906.98,51.28 ; 3905.33,43.25 3905.38,35.05 ; 3905.33,43.25 3906.98,51.28 ; 3905.33,3893.76 3906.98,3885.73 ; 3905.33,3893.76 3905.38,3901.96 ; 3905.33,3893.76 3906.98,3885.73 ; 3905.33,3893.76 3905.38,3901.96 ; 3905.38,35.05 3907.12,27.03 ; 3905.38,35.05 3907.12,27.03 ; 3905.38,3901.96 3907.12,3909.97 ; 3905.38,3901.96 3907.12,3909.97 ; 3906.98,51.28 3910.26,58.79 ; 3906.98,51.28 3910.26,58.79 ; 3906.98,3885.73 3910.26,3878.21 ; 3906.98,3885.73 3910.26,3878.21 ; 3907.12,27.03 3910.49,19.56 ; 3907.12,27.03 3910.49,19.56 ; 3907.12,3909.97 3910.49,3917.45 ; 3907.12,3909.97 3910.49,3917.45 ; 3910.26,58.79 3915.03,65.47 ; 3910.26,58.79 3915.03,65.47 ; 3910.26,3878.21 3915.03,3871.54 ; 3910.26,3878.21 3915.03,3871.54 ; 3910.49,19.56 3915.33,12.94 ; 3910.49,19.56 3915.33,12.94 ; 3910.49,3917.45 3915.33,3924.07 ; 3910.49,3917.45 3915.33,3924.07 ; 3915.03,65.47 3921.08,71.01 ; 3915.03,65.47 3921.08,71.01 ; 3915.03,3871.54 3921.08,3866 ; 3915.03,3871.54 3921.08,3866 ; 3915.33,12.94 3921.44,7.47 ; 3915.33,12.94 3921.44,7.47 ; 3915.33,3924.07 3921.44,3929.54 ; 3915.33,3924.07 3921.44,3929.54 ; 3921.08,71.01 4044.68,162.54 ; 3921.08,71.01 4044.68,162.54 ; 3921.08,3866 4044.68,3774.46 ; 3921.08,3866 4044.68,3774.46 ; 3921.44,7.47 3928.55,3.38 ; 3921.44,7.47 3928.55,3.38 ; 3921.44,3929.54 3928.55,3933.63 ; 3921.44,3929.54 3928.55,3933.63 ; 3928.55,3.38 3936.35,0.85 ; 3928.55,3.38 3936.35,0.85 ; 3928.55,3933.63 3936.35,3936.15 ; 3928.55,3933.63 3936.35,3936.15 ; 3936.35,0.85 3944.51,0 ; 3936.35,0.85 3944.51,0 ; 3936.35,3936.15 3944.51,3937.01 ; 3936.35,3936.15 3944.51,3937.01 ; 3944.51,0 5495.23,0 ; 3944.51,0 5495.23,0 ; 3944.51,3937.01 5495.23,3937.01 ; 3944.51,3937.01 5495.23,3937.01 ; 3967.15,338.45 3985.15,349.02 ; 3967.15,338.45 3985.15,349.02 ; 3967.15,3598.56 3985.15,3587.99 ; 3967.15,3598.56 3985.15,3587.99 ; 3985.15,349.02 4004.97,355.56 ; 3985.15,349.02 4004.97,355.56 ; 3985.15,3587.99 4004.97,3581.45 ; 3985.15,3587.99 4004.97,3581.45 ; 4004.97,355.56 4025.73,357.78 ; 4004.97,355.56 4025.73,357.78 ; 4004.97,3581.45 4025.73,3579.23 ; 4004.97,3581.45 4025.73,3579.23 ; 4025.73,357.78 4822.83,357.78 ; 4025.73,357.78 4822.83,357.78 ; 4025.73,3579.23 4822.83,3579.23 ; 4025.73,3579.23 4822.83,3579.23 ; 4044.68,162.54 4051.88,166.77 ; 4044.68,162.54 4051.88,166.77 ; 4044.68,3774.46 4051.88,3770.23 ; 4044.68,3774.46 4051.88,3770.23 ; 4051.88,166.77 4059.81,169.39 ; 4051.88,166.77 4059.81,169.39 ; 4051.88,3770.23 4059.81,3767.62 ; 4051.88,3770.23 4059.81,3767.62 ; 4059.81,169.39 4068.11,170.28 ; 4059.81,169.39 4068.11,170.28 ; 4059.81,3767.62 4068.11,3766.73 ; 4059.81,3767.62 4068.11,3766.73 ; 4068.11,170.28 4112.78,170.28 ; 4068.11,170.28 4112.78,170.28 ; 4068.11,3766.73 4112.78,3766.73 ; 4068.11,3766.73 4112.78,3766.73 ; 4112.78,170.28 4121.56,169.28 ; 4112.78,170.28 4121.56,169.28 ; 4112.78,3766.73 4121.56,3767.72 ; 4112.78,3766.73 4121.56,3767.72 ; 4121.56,169.28 4129.9,166.35 ; 4121.56,169.28 4129.9,166.35 ; 4121.56,3767.72 4129.9,3770.65 ; 4121.56,3767.72 4129.9,3770.65 ; 4129.9,166.35 4137.38,161.64 ; 4129.9,166.35 4137.38,161.64 ; 4129.9,3770.65 4137.38,3775.37 ; 4129.9,3770.65 4137.38,3775.37 ; 4137.38,161.64 4143.62,155.37 ; 4137.38,161.64 4143.62,155.37 ; 4137.38,3775.37 4143.62,3781.64 ; 4137.38,3775.37 4143.62,3781.64 ; 4143.62,155.37 4159.22,139.7 ; 4143.62,155.37 4159.22,139.7 ; 4143.62,3781.64 4159.22,3797.3 ; 4143.62,3781.64 4159.22,3797.3 ; 4159.22,139.7 4177.91,127.91 ; 4159.22,139.7 4177.91,127.91 ; 4159.22,3797.3 4177.91,3809.09 ; 4159.22,3797.3 4177.91,3809.09 ; 4177.91,127.91 4198.77,120.59 ; 4177.91,127.91 4198.77,120.59 ; 4177.91,3809.09 4198.77,3816.42 ; 4177.91,3809.09 4198.77,3816.42 ; 4198.77,120.59 4220.73,118.11 ; 4198.77,120.59 4220.73,118.11 ; 4198.77,3816.42 4220.73,3818.9 ; 4198.77,3816.42 4220.73,3818.9 ; 4220.73,118.11 4822.83,118.11 ; 4220.73,118.11 4822.83,118.11 ; 4220.73,3818.9 4822.83,3818.9 ; 4220.73,3818.9 4822.83,3818.9 ; 4822.83,118.11 4844.74,120.58 ; 4822.83,118.11 4844.74,120.58 ; 4822.83,357.78 4844.74,355.31 ; 4822.83,357.78 4844.74,355.31 ; 4822.83,3579.23 4844.74,3581.7 ; 4822.83,3579.23 4844.74,3581.7 ; 4822.83,3818.9 4844.74,3816.43 ; 4822.83,3818.9 4844.74,3816.43 ; 4844.74,120.58 4865.54,127.86 ; 4844.74,120.58 4865.54,127.86 ; 4844.74,355.31 4865.54,348.03 ; 4844.74,355.31 4865.54,348.03 ; 4844.74,3581.7 4865.54,3588.98 ; 4844.74,3581.7 4865.54,3588.98 ; 4844.74,3816.43 4865.54,3809.15 ; 4844.74,3816.43 4865.54,3809.15 ; 4865.54,127.86 4884.2,139.58 ; 4865.54,127.86 4884.2,139.58 ; 4865.54,348.03 4884.2,336.3 ; 4865.54,348.03 4884.2,336.3 ; 4865.54,3588.98 4884.2,3600.71 ; 4865.54,3588.98 4884.2,3600.71 ; 4865.54,3809.15 4884.2,3797.42 ; 4865.54,3809.15 4884.2,3797.42 ; 4884.2,139.58 4899.79,155.17 ; 4884.2,139.58 4899.79,155.17 ; 4884.2,336.3 4899.79,320.72 ; 4884.2,336.3 4899.79,320.72 ; 4884.2,3600.71 4899.79,3616.29 ; 4884.2,3600.71 4899.79,3616.29 ; 4884.2,3797.42 4899.79,3781.84 ; 4884.2,3797.42 4899.79,3781.84 ; 4899.79,155.17 4911.51,173.83 ; 4899.79,155.17 4911.51,173.83 ; 4899.79,320.72 4911.51,302.06 ; 4899.79,320.72 4911.51,302.06 ; 4899.79,3616.29 4911.51,3634.95 ; 4899.79,3616.29 4911.51,3634.95 ; 4899.79,3781.84 4911.51,3763.18 ; 4899.79,3781.84 4911.51,3763.18 ; 4911.51,173.83 4918.79,194.63 ; 4911.51,173.83 4918.79,194.63 ; 4911.51,302.06 4918.79,281.25 ; 4911.51,302.06 4918.79,281.25 ; 4911.51,3634.95 4918.79,3655.76 ; 4911.51,3634.95 4918.79,3655.76 ; 4911.51,3763.18 4918.79,3742.37 ; 4911.51,3763.18 4918.79,3742.37 ; 4918.79,194.63 4921.26,216.54 ; 4918.79,194.63 4921.26,216.54 ; 4918.79,281.25 4921.26,259.35 ; 4918.79,281.25 4921.26,259.35 ; 4918.79,3655.76 4921.26,3677.66 ; 4918.79,3655.76 4921.26,3677.66 ; 4918.79,3742.37 4921.26,3720.47 ; 4918.79,3742.37 4921.26,3720.47 ; 4921.26,216.54 4921.26,259.35 ; 4921.26,216.54 4921.26,259.35 ; 4921.26,3677.66 4921.26,3720.47 ; 4921.26,3677.66 4921.26,3720.47 ; 5495.23,0 5497.7,21.9 ; 5495.23,0 5497.7,21.9 ; 5495.23,3937.01 5497.7,3915.11 ; 5495.23,3937.01 5497.7,3915.11 ; 5497.7,21.9 5504.98,42.7 ; 5497.7,21.9 5504.98,42.7 ; 5497.7,3915.11 5504.98,3894.3 ; 5497.7,3915.11 5504.98,3894.3 ; 5504.98,42.7 5516.7,61.37 ; 5504.98,42.7 5516.7,61.37 ; 5504.98,3894.3 5516.7,3875.64 ; 5504.98,3894.3 5516.7,3875.64 ; 5516.7,61.37 5532.29,76.95 ; 5516.7,61.37 5532.29,76.95 ; 5516.7,3875.64 5532.29,3860.06 ; 5516.7,3875.64 5532.29,3860.06 ; 5532.29,76.95 5550.95,88.68 ; 5532.29,76.95 5550.95,88.68 ; 5532.29,3860.06 5550.95,3848.33 ; 5532.29,3860.06 5550.95,3848.33 ; 5550.95,88.68 5571.75,95.96 ; 5550.95,88.68 5571.75,95.96 ; 5550.95,3848.33 5571.75,3841.05 ; 5550.95,3848.33 5571.75,3841.05 ; 5571.75,95.96 5593.66,98.42 ; 5571.75,95.96 5593.66,98.42 ; 5571.75,3841.05 5593.66,3838.58 ; 5571.75,3841.05 5593.66,3838.58 ; 5593.66,98.42 5987.36,98.42 ; 5593.66,98.42 5987.36,98.42 ; 5593.66,3838.58 5987.36,3838.58 ; 5593.66,3838.58 5987.36,3838.58 ; 5987.36,98.42 6009.26,95.96 ; 5987.36,98.42 6009.26,95.96 ; 5987.36,3838.58 6009.26,3841.05 ; 5987.36,3838.58 6009.26,3841.05 ; 6009.26,95.96 6030.06,88.68 ; 6009.26,95.96 6030.06,88.68 ; 6009.26,3841.05 6030.06,3848.33 ; 6009.26,3841.05 6030.06,3848.33 ; 6030.06,88.68 6048.72,76.95 ; 6030.06,88.68 6048.72,76.95 ; 6030.06,3848.33 6048.72,3860.06 ; 6030.06,3848.33 6048.72,3860.06 ; 6048.72,76.95 6064.31,61.37 ; 6048.72,76.95 6064.31,61.37 ; 6048.72,3860.06 6064.31,3875.64 ; 6048.72,3860.06 6064.31,3875.64 ; 6064.31,61.37 6076.03,42.7 ; 6064.31,61.37 6076.03,42.7 ; 6064.31,3875.64 6076.03,3894.3 ; 6064.31,3875.64 6076.03,3894.3 ; 6076.03,42.7 6083.31,21.9 ; 6076.03,42.7 6083.31,21.9 ; 6076.03,3894.3 6083.31,3915.11 ; 6076.03,3894.3 6083.31,3915.11 ; 6083.31,21.9 6085.78,0 ; 6083.31,21.9 6085.78,0 ; 6083.31,3915.11 6085.78,3937.01 ; 6083.31,3915.11 6085.78,3937.01 ; 6085.78,0 6659.75,0 ; 6085.78,0 6659.75,0 ; 6085.78,3937.01 6659.75,3937.01 ; 6085.78,3937.01 6659.75,3937.01 ; 6659.75,0 7116.75,338.45 ; 6659.75,0 7116.75,338.45 ; 6659.75,3937.01 7116.75,3598.56 ; 6659.75,3937.01 7116.75,3598.56 ; 7054.94,43.25 7054.98,35.05 ; 7054.94,43.25 7056.59,51.28 ; 7054.94,43.25 7054.98,35.05 ; 7054.94,43.25 7056.59,51.28 ; 7054.94,3893.76 7056.59,3885.73 ; 7054.94,3893.76 7054.98,3901.96 ; 7054.94,3893.76 7056.59,3885.73 ; 7054.94,3893.76 7054.98,3901.96 ; 7054.98,35.05 7056.73,27.03 ; 7054.98,35.05 7056.73,27.03 ; 7054.98,3901.96 7056.73,3909.97 ; 7054.98,3901.96 7056.73,3909.97 ; 7056.59,51.28 7059.87,58.79 ; 7056.59,51.28 7059.87,58.79 ; 7056.59,3885.73 7059.87,3878.21 ; 7056.59,3885.73 7059.87,3878.21 ; 7056.73,27.03 7060.1,19.56 ; 7056.73,27.03 7060.1,19.56 ; 7056.73,3909.97 7060.1,3917.45 ; 7056.73,3909.97 7060.1,3917.45 ; 7059.87,58.79 7064.64,65.47 ; 7059.87,58.79 7064.64,65.47 ; 7059.87,3878.21 7064.64,3871.54 ; 7059.87,3878.21 7064.64,3871.54 ; 7060.1,19.56 7064.94,12.94 ; 7060.1,19.56 7064.94,12.94 ; 7060.1,3917.45 7064.94,3924.07 ; 7060.1,3917.45 7064.94,3924.07 ; 7064.64,65.47 7070.68,71.01 ; 7064.64,65.47 7070.68,71.01 ; 7064.64,3871.54 7070.68,3866 ; 7064.64,3871.54 7070.68,3866 ; 7064.94,12.94 7071.05,7.47 ; 7064.94,12.94 7071.05,7.47 ; 7064.94,3924.07 7071.05,3929.54 ; 7064.94,3924.07 7071.05,3929.54 ; 7070.68,71.01 7194.28,162.54 ; 7070.68,71.01 7194.28,162.54 ; 7070.68,3866 7194.28,3774.46 ; 7070.68,3866 7194.28,3774.46 ; 7071.05,7.47 7078.16,3.38 ; 7071.05,7.47 7078.16,3.38 ; 7071.05,3929.54 7078.16,3933.63 ; 7071.05,3929.54 7078.16,3933.63 ; 7078.16,3.38 7085.96,0.85 ; 7078.16,3.38 7085.96,0.85 ; 7078.16,3933.63 7085.96,3936.15 ; 7078.16,3933.63 7085.96,3936.15 ; 7085.96,0.85 7094.12,0 ; 7085.96,0.85 7094.12,0 ; 7085.96,3936.15 7094.12,3937.01 ; 7085.96,3936.15 7094.12,3937.01 ; 7094.12,0 8533.96,0 ; 7094.12,0 8533.96,0 ; 7094.12,3937.01 8533.96,3937.01 ; 7094.12,3937.01 8533.96,3937.01 ; 7116.75,338.45 7134.75,349.02 ; 7116.75,338.45 7134.75,349.02 ; 7116.75,3598.56 7134.75,3587.99 ; 7116.75,3598.56 7134.75,3587.99 ; 7134.75,349.02 7154.58,355.56 ; 7134.75,349.02 7154.58,355.56 ; 7134.75,3587.99 7154.58,3581.45 ; 7134.75,3587.99 7154.58,3581.45 ; 7154.58,355.56 7175.33,357.78 ; 7154.58,355.56 7175.33,357.78 ; 7154.58,3581.45 7175.33,3579.23 ; 7154.58,3581.45 7175.33,3579.23 ; 7175.33,357.78 7972.44,357.78 ; 7175.33,357.78 7972.44,357.78 ; 7175.33,3579.23 7972.44,3579.23 ; 7175.33,3579.23 7972.44,3579.23 ; 7194.28,162.54 7201.48,166.77 ; 7194.28,162.54 7201.48,166.77 ; 7194.28,3774.46 7201.48,3770.23 ; 7194.28,3774.46 7201.48,3770.23 ; 7201.48,166.77 7209.41,169.39 ; 7201.48,166.77 7209.41,169.39 ; 7201.48,3770.23 7209.41,3767.62 ; 7201.48,3770.23 7209.41,3767.62 ; 7209.41,169.39 7217.72,170.28 ; 7209.41,169.39 7217.72,170.28 ; 7209.41,3767.62 7217.72,3766.73 ; 7209.41,3767.62 7217.72,3766.73 ; 7217.72,170.28 7262.38,170.28 ; 7217.72,170.28 7262.38,170.28 ; 7217.72,3766.73 7262.38,3766.73 ; 7217.72,3766.73 7262.38,3766.73 ; 7262.38,170.28 7271.17,169.28 ; 7262.38,170.28 7271.17,169.28 ; 7262.38,3766.73 7271.17,3767.72 ; 7262.38,3766.73 7271.17,3767.72 ; 7271.17,169.28 7279.51,166.35 ; 7271.17,169.28 7279.51,166.35 ; 7271.17,3767.72 7279.51,3770.65 ; 7271.17,3767.72 7279.51,3770.65 ; 7279.51,166.35 7286.99,161.64 ; 7279.51,166.35 7286.99,161.64 ; 7279.51,3770.65 7286.99,3775.37 ; 7279.51,3770.65 7286.99,3775.37 ; 7286.99,161.64 7293.23,155.37 ; 7286.99,161.64 7293.23,155.37 ; 7286.99,3775.37 7293.23,3781.64 ; 7286.99,3775.37 7293.23,3781.64 ; 7293.23,155.37 7308.82,139.7 ; 7293.23,155.37 7308.82,139.7 ; 7293.23,3781.64 7308.82,3797.3 ; 7293.23,3781.64 7308.82,3797.3 ; 7308.82,139.7 7327.52,127.91 ; 7308.82,139.7 7327.52,127.91 ; 7308.82,3797.3 7327.52,3809.09 ; 7308.82,3797.3 7327.52,3809.09 ; 7327.52,127.91 7348.38,120.59 ; 7327.52,127.91 7348.38,120.59 ; 7327.52,3809.09 7348.38,3816.42 ; 7327.52,3809.09 7348.38,3816.42 ; 7348.38,120.59 7370.34,118.11 ; 7348.38,120.59 7370.34,118.11 ; 7348.38,3816.42 7370.34,3818.9 ; 7348.38,3816.42 7370.34,3818.9 ; 7370.34,118.11 7972.44,118.11 ; 7370.34,118.11 7972.44,118.11 ; 7370.34,3818.9 7972.44,3818.9 ; 7370.34,3818.9 7972.44,3818.9 ; 7972.44,118.11 7994.34,120.58 ; 7972.44,118.11 7994.34,120.58 ; 7972.44,357.78 7994.34,355.31 ; 7972.44,357.78 7994.34,355.31 ; 7972.44,3579.23 7994.34,3581.7 ; 7972.44,3579.23 7994.34,3581.7 ; 7972.44,3818.9 7994.34,3816.43 ; 7972.44,3818.9 7994.34,3816.43 ; 7994.34,120.58 8015.15,127.86 ; 7994.34,120.58 8015.15,127.86 ; 7994.34,355.31 8015.15,348.03 ; 7994.34,355.31 8015.15,348.03 ; 7994.34,3581.7 8015.15,3588.98 ; 7994.34,3581.7 8015.15,3588.98 ; 7994.34,3816.43 8015.15,3809.15 ; 7994.34,3816.43 8015.15,3809.15 ; 8015.15,127.86 8033.81,139.58 ; 8015.15,127.86 8033.81,139.58 ; 8015.15,348.03 8033.81,336.3 ; 8015.15,348.03 8033.81,336.3 ; 8015.15,3588.98 8033.81,3600.71 ; 8015.15,3588.98 8033.81,3600.71 ; 8015.15,3809.15 8033.81,3797.42 ; 8015.15,3809.15 8033.81,3797.42 ; 8033.81,139.58 8049.39,155.17 ; 8033.81,139.58 8049.39,155.17 ; 8033.81,336.3 8049.39,320.72 ; 8033.81,336.3 8049.39,320.72 ; 8033.81,3600.71 8049.39,3616.29 ; 8033.81,3600.71 8049.39,3616.29 ; 8033.81,3797.42 8049.39,3781.84 ; 8033.81,3797.42 8049.39,3781.84 ; 8049.39,155.17 8061.12,173.83 ; 8049.39,155.17 8061.12,173.83 ; 8049.39,320.72 8061.12,302.06 ; 8049.39,320.72 8061.12,302.06 ; 8049.39,3616.29 8061.12,3634.95 ; 8049.39,3616.29 8061.12,3634.95 ; 8049.39,3781.84 8061.12,3763.18 ; 8049.39,3781.84 8061.12,3763.18 ; 8061.12,173.83 8068.4,194.63 ; 8061.12,173.83 8068.4,194.63 ; 8061.12,302.06 8068.4,281.25 ; 8061.12,302.06 8068.4,281.25 ; 8061.12,3634.95 8068.4,3655.76 ; 8061.12,3634.95 8068.4,3655.76 ; 8061.12,3763.18 8068.4,3742.37 ; 8061.12,3763.18 8068.4,3742.37 ; 8068.4,194.63 8070.87,216.54 ; 8068.4,194.63 8070.87,216.54 ; 8068.4,281.25 8070.87,259.35 ; 8068.4,281.25 8070.87,259.35 ; 8068.4,3655.76 8070.87,3677.66 ; 8068.4,3655.76 8070.87,3677.66 ; 8068.4,3742.37 8070.87,3720.47 ; 8068.4,3742.37 8070.87,3720.47 ; 8070.87,216.54 8070.87,259.35 ; 8070.87,216.54 8070.87,259.35 ; 8070.87,3677.66 8070.87,3720.47 ; 8070.87,3677.66 8070.87,3720.47 ; 8436.07,284.99 8436.07,305.56 ; 8436.07,284.99 8440.35,264.86 ; 8436.07,284.99 8436.07,305.56 ; 8436.07,284.99 8440.35,264.86 ; 8436.07,305.56 8440.35,325.69 ; 8436.07,305.56 8440.35,325.69 ; 8436.07,1466.09 8436.07,1486.67 ; 8436.07,1466.09 8440.35,1445.96 ; 8436.07,1466.09 8436.07,1486.67 ; 8436.07,1466.09 8440.35,1445.96 ; 8436.07,1486.67 8440.35,1506.79 ; 8436.07,1486.67 8440.35,1506.79 ; 8436.07,2450.34 8436.07,2470.92 ; 8436.07,2450.34 8440.35,2430.21 ; 8436.07,2450.34 8436.07,2470.92 ; 8436.07,2450.34 8440.35,2430.21 ; 8436.07,2470.92 8440.35,2491.04 ; 8436.07,2470.92 8440.35,2491.04 ; 8436.07,3631.44 8436.07,3652.02 ; 8436.07,3631.44 8440.35,3611.32 ; 8436.07,3631.44 8436.07,3652.02 ; 8436.07,3631.44 8440.35,3611.32 ; 8436.07,3652.02 8440.35,3672.15 ; 8436.07,3652.02 8440.35,3672.15 ; 8440.35,264.86 8448.72,246.06 ; 8440.35,264.86 8448.72,246.06 ; 8440.35,325.69 8448.72,344.49 ; 8440.35,325.69 8448.72,344.49 ; 8440.35,1445.96 8448.72,1427.17 ; 8440.35,1445.96 8448.72,1427.17 ; 8440.35,1506.79 8448.72,1525.59 ; 8440.35,1506.79 8448.72,1525.59 ; 8440.35,2430.21 8448.72,2411.42 ; 8440.35,2430.21 8448.72,2411.42 ; 8440.35,2491.04 8448.72,2509.84 ; 8440.35,2491.04 8448.72,2509.84 ; 8440.35,3611.32 8448.72,3592.52 ; 8440.35,3611.32 8448.72,3592.52 ; 8440.35,3672.15 8448.72,3690.94 ; 8440.35,3672.15 8448.72,3690.94 ; 8448.72,246.06 8460.81,229.42 ; 8448.72,246.06 8460.81,229.42 ; 8448.72,344.49 8460.81,361.13 ; 8448.72,344.49 8460.81,361.13 ; 8448.72,1427.17 8460.81,1410.52 ; 8448.72,1427.17 8460.81,1410.52 ; 8448.72,1525.59 8460.81,1542.24 ; 8448.72,1525.59 8460.81,1542.24 ; 8448.72,2411.42 8460.81,2394.77 ; 8448.72,2411.42 8460.81,2394.77 ; 8448.72,2509.84 8460.81,2526.49 ; 8448.72,2509.84 8460.81,2526.49 ; 8448.72,3592.52 8460.81,3575.87 ; 8448.72,3592.52 8460.81,3575.87 ; 8448.72,3690.94 8460.81,3707.59 ; 8448.72,3690.94 8460.81,3707.59 ; 8460.81,229.42 8476.1,215.65 ; 8460.81,229.42 8476.1,215.65 ; 8460.81,361.13 8476.1,374.9 ; 8460.81,361.13 8476.1,374.9 ; 8460.81,1410.52 8476.1,1396.75 ; 8460.81,1410.52 8476.1,1396.75 ; 8460.81,1542.24 8476.1,1556.01 ; 8460.81,1542.24 8476.1,1556.01 ; 8460.81,2394.77 8476.1,2381 ; 8460.81,2394.77 8476.1,2381 ; 8460.81,2526.49 8476.1,2540.26 ; 8460.81,2526.49 8476.1,2540.26 ; 8460.81,3575.87 8476.1,3562.1 ; 8460.81,3575.87 8476.1,3562.1 ; 8460.81,3707.59 8476.1,3721.36 ; 8460.81,3707.59 8476.1,3721.36 ; 8476.1,215.65 8493.92,205.36 ; 8476.1,215.65 8493.92,205.36 ; 8476.1,374.9 8493.92,385.19 ; 8476.1,374.9 8493.92,385.19 ; 8476.1,1396.75 8493.92,1386.46 ; 8476.1,1396.75 8493.92,1386.46 ; 8476.1,1556.01 8493.92,1566.29 ; 8476.1,1556.01 8493.92,1566.29 ; 8476.1,2381 8493.92,2370.71 ; 8476.1,2381 8493.92,2370.71 ; 8476.1,2540.26 8493.92,2550.55 ; 8476.1,2540.26 8493.92,2550.55 ; 8476.1,3562.1 8493.92,3551.82 ; 8476.1,3562.1 8493.92,3551.82 ; 8476.1,3721.36 8493.92,3731.65 ; 8476.1,3721.36 8493.92,3731.65 ; 8493.92,205.36 8513.49,199 ; 8493.92,205.36 8513.49,199 ; 8493.92,385.19 8513.49,391.55 ; 8493.92,385.19 8513.49,391.55 ; 8493.92,1386.46 8513.49,1380.1 ; 8493.92,1386.46 8513.49,1380.1 ; 8493.92,1566.29 8513.49,1572.65 ; 8493.92,1566.29 8513.49,1572.65 ; 8493.92,2370.71 8513.49,2364.36 ; 8493.92,2370.71 8513.49,2364.36 ; 8493.92,2550.55 8513.49,2556.9 ; 8493.92,2550.55 8513.49,2556.9 ; 8493.92,3551.82 8513.49,3545.46 ; 8493.92,3551.82 8513.49,3545.46 ; 8493.92,3731.65 8513.49,3738.01 ; 8493.92,3731.65 8513.49,3738.01 ; 8513.49,199 8533.96,196.85 ; 8513.49,199 8533.96,196.85 ; 8513.49,391.55 8533.96,393.7 ; 8513.49,391.55 8533.96,393.7 ; 8513.49,1380.1 8533.96,1377.95 ; 8513.49,1380.1 8533.96,1377.95 ; 8513.49,1572.65 8533.96,1574.8 ; 8513.49,1572.65 8533.96,1574.8 ; 8513.49,2364.36 8533.96,2362.2 ; 8513.49,2364.36 8533.96,2362.2 ; 8513.49,2556.9 8533.96,2559.05 ; 8513.49,2556.9 8533.96,2559.05 ; 8513.49,3545.46 8533.96,3543.31 ; 8513.49,3545.46 8533.96,3543.31 ; 8513.49,3738.01 8533.96,3740.16 ; 8513.49,3738.01 8533.96,3740.16 ; 8533.96,0 8533.96,196.85 ; 8533.96,0 8533.96,196.85 ; 8533.96,393.7 8721.46,393.7 ; 8533.96,393.7 8721.46,393.7 ; 8533.96,1377.95 8721.46,1377.95 ; 8533.96,1377.95 8721.46,1377.95 ; 8533.96,1574.8 8533.96,2362.2 ; 8533.96,1574.8 8533.96,2362.2 ; 8533.96,2559.05 8721.46,2559.05 ; 8533.96,2559.05 8721.46,2559.05 ; 8533.96,3543.31 8721.46,3543.31 ; 8533.96,3543.31 8721.46,3543.31 ; 8533.96,3740.16 8533.96,3937.01 ; 8533.96,3740.16 8533.96,3937.01 ; 8721.46,393.7 8721.46,1377.95 ; 8721.46,393.7 8721.46,1377.95 ; 8721.46,2559.05 8721.46,3543.31 ; 8721.46,2559.05 8721.46,3543.31 ; 1106.4,379.33 1106.4,1732.28 1108.86,1754.18 1116.14,1774.99 1127.87,1793.65 1143.46,1809.24 1162.12,1820.96 1182.92,1828.24 1204.82,1830.71 1283.56,1830.71 1305.46,1828.24 1326.27,1820.96 1344.93,1809.24 1360.51,1793.65 1372.24,1774.99 1379.52,1754.18 1381.99,1732.28 1381.99,379.33 1379.52,357.43 1372.24,336.63 1360.51,317.96 1344.93,302.38 1326.27,290.65 1305.46,283.37 1283.56,280.91 1204.82,280.91 1182.92,283.37 1162.12,290.65 1143.46,302.38 1127.87,317.96 1116.14,336.63 1108.86,357.43 1106.4,379.33 ; 1106.4,2204.72 1106.4,3557.68 1108.86,3579.58 1116.14,3600.38 1127.87,3619.04 1143.46,3634.63 1162.12,3646.35 1182.92,3653.63 1204.82,3656.1 1283.56,3656.1 1305.46,3653.63 1326.27,3646.35 1344.93,3634.63 1360.51,3619.04 1372.24,3600.38 1379.52,3579.58 1381.99,3557.68 1381.99,2204.72 1379.52,2182.82 1372.24,2162.02 1360.51,2143.36 1344.93,2127.77 1326.27,2116.05 1305.46,2108.77 1283.56,2106.3 1204.82,2106.3 1182.92,2108.77 1162.12,2116.05 1143.46,2127.77 1127.87,2143.36 1116.14,2162.02 1108.86,2182.82 1106.4,2204.72 ; 2465.2,1302.05 2465.2,1322.62 2469.48,1342.75 2477.85,1361.55 2489.95,1378.19 2505.24,1391.96 2523.06,1402.25 2542.63,1408.61 2563.09,1410.76 2799.31,1410.76 2819.77,1408.61 2839.34,1402.25 2857.16,1391.96 2872.45,1378.19 2884.55,1361.55 2892.92,1342.75 2897.2,1322.62 2897.2,1302.05 2892.92,1281.92 2884.55,1263.12 2872.45,1246.48 2857.16,1232.71 2839.34,1222.42 2819.77,1216.06 2799.31,1213.91 2563.09,1213.91 2542.63,1216.06 2523.06,1222.42 2505.24,1232.71 2489.95,1246.48 2477.85,1263.12 2469.48,1281.92 2465.2,1302.05 ; 2465.2,2614.38 2465.2,2634.96 2469.48,2655.09 2477.85,2673.88 2489.95,2690.53 2505.24,2704.3 2523.06,2714.59 2542.63,2720.95 2563.09,2723.1 2799.31,2723.1 2819.77,2720.95 2839.34,2714.59 2857.16,2704.3 2872.45,2690.53 2884.55,2673.88 2892.92,2655.09 2897.2,2634.96 2897.2,2614.38 2892.92,2594.26 2884.55,2575.46 2872.45,2558.81 2857.16,2545.04 2839.34,2534.76 2819.77,2528.4 2799.31,2526.25 2563.09,2526.25 2542.63,2528.4 2523.06,2534.76 2505.24,2545.04 2489.95,2558.81 2477.85,2575.46 2469.48,2594.26 2465.2,2614.38 ; 3951.84,1515.75 3951.84,2421.26 3954.31,2443.16 3961.59,2463.96 3973.31,2482.63 3988.9,2498.21 4007.56,2509.94 4028.36,2517.22 4050.26,2519.68 4325.85,2519.68 4347.76,2517.22 4368.56,2509.94 4387.22,2498.21 4402.81,2482.63 4414.53,2463.96 4421.81,2443.16 4424.28,2421.26 4424.28,1515.75 4421.81,1493.85 4414.53,1473.04 4402.81,1454.38 4387.22,1438.8 4368.56,1427.07 4347.76,1419.79 4325.85,1417.32 4050.26,1417.32 4028.36,1419.79 4007.56,1427.07 3988.9,1438.8 3973.31,1454.38 3961.59,1473.04 3954.31,1493.85 3951.84,1515.75 ; 5495.77,422.78 5495.77,443.36 5500.05,463.49 5508.42,482.28 5520.51,498.93 5535.8,512.7 5553.62,522.99 5573.19,529.35 5593.66,531.5 5987.36,531.5 6007.82,529.35 6027.39,522.99 6045.21,512.7 6060.5,498.93 6072.6,482.28 6080.96,463.49 6085.24,443.36 6085.24,422.78 6080.96,402.66 6072.6,383.86 6060.5,367.21 6045.21,353.44 6027.39,343.15 6007.82,336.8 5987.36,334.65 5593.66,334.65 5573.19,336.8 5553.62,343.15 5535.8,353.44 5520.51,367.21 5508.42,383.86 5500.05,402.66 5495.77,422.78 ; 5495.77,3493.65 5495.77,3514.22 5500.05,3534.35 5508.42,3553.15 5520.51,3569.8 5535.8,3583.56 5553.62,3593.85 5573.19,3600.21 5593.66,3602.36 5987.36,3602.36 6007.82,3600.21 6027.39,3593.85 6045.21,3583.56 6060.5,3569.8 6072.6,3553.15 6080.96,3534.35 6085.24,3514.22 6085.24,3493.65 6080.96,3473.52 6072.6,3454.72 6060.5,3438.08 6045.21,3424.31 6027.39,3414.02 6007.82,3407.66 5987.36,3405.51 5593.66,3405.51 5573.19,3407.66 5553.62,3414.02 5535.8,3424.31 5520.51,3438.08 5508.42,3454.72 5500.05,3473.52 5495.77,3493.65 ; 6261.37,973.96 6261.37,994.54 6265.64,1014.67 6274.01,1033.46 6286.11,1050.11 6301.4,1063.88 6319.22,1074.17 6338.79,1080.53 6359.25,1082.68 6949.8,1082.68 6970.27,1080.53 6989.84,1074.17 7007.66,1063.88 7022.95,1050.11 7035.04,1033.46 7043.41,1014.67 7047.69,994.54 7047.69,973.96 7043.41,953.84 7035.04,935.04 7022.95,918.39 7007.66,904.62 6989.84,894.34 6970.27,887.98 6949.8,885.83 6359.25,885.83 6338.79,887.98 6319.22,894.34 6301.4,904.62 6286.11,918.39 6274.01,935.04 6265.64,953.84 6261.37,973.96 ; 6261.37,2942.47 6261.37,2963.04 6265.64,2983.17 6274.01,3001.97 6286.11,3018.61 6301.4,3032.38 6319.22,3042.67 6338.79,3049.03 6359.25,3051.18 6949.8,3051.18 6970.27,3049.03 6989.84,3042.67 7007.66,3032.38 7022.95,3018.61 7035.04,3001.97 7043.41,2983.17 7047.69,2963.04 7047.69,2942.47 7043.41,2922.34 7035.04,2903.54 7022.95,2886.9 7007.66,2873.13 6989.84,2862.84 6970.27,2856.48 6949.8,2854.33 6359.25,2854.33 6338.79,2856.48 6319.22,2862.84 6301.4,2873.13 6286.11,2886.9 6274.01,2903.54 6265.64,2922.34 6261.37,2942.47

## Other copper
Bottom Layer:
  pour cut-out: 4963.19,2346.3 5026.18,2346.3 5024.86,2347.62 5024.86,2522.97 4967.03,2522.97 4965,2525 4963.19,2523.19
  pour cut-out: 4920,1016.18 4980,1016.18 4980,960 4980,945 4920,945